# Altium PCB SignalAnalyse.PcbDoc (part 2 of 2)
Units mil, origin at the board's own origin, x right, y up, seen from the top; angles counter-clockwise.
Board outline 5265 x 1800 mil, 2 copper layers (Top Layer, Bottom Layer); 89 components, 53 nets, 353 pads, 52 vias.
Unrouted connection lines stored in the file: 1.
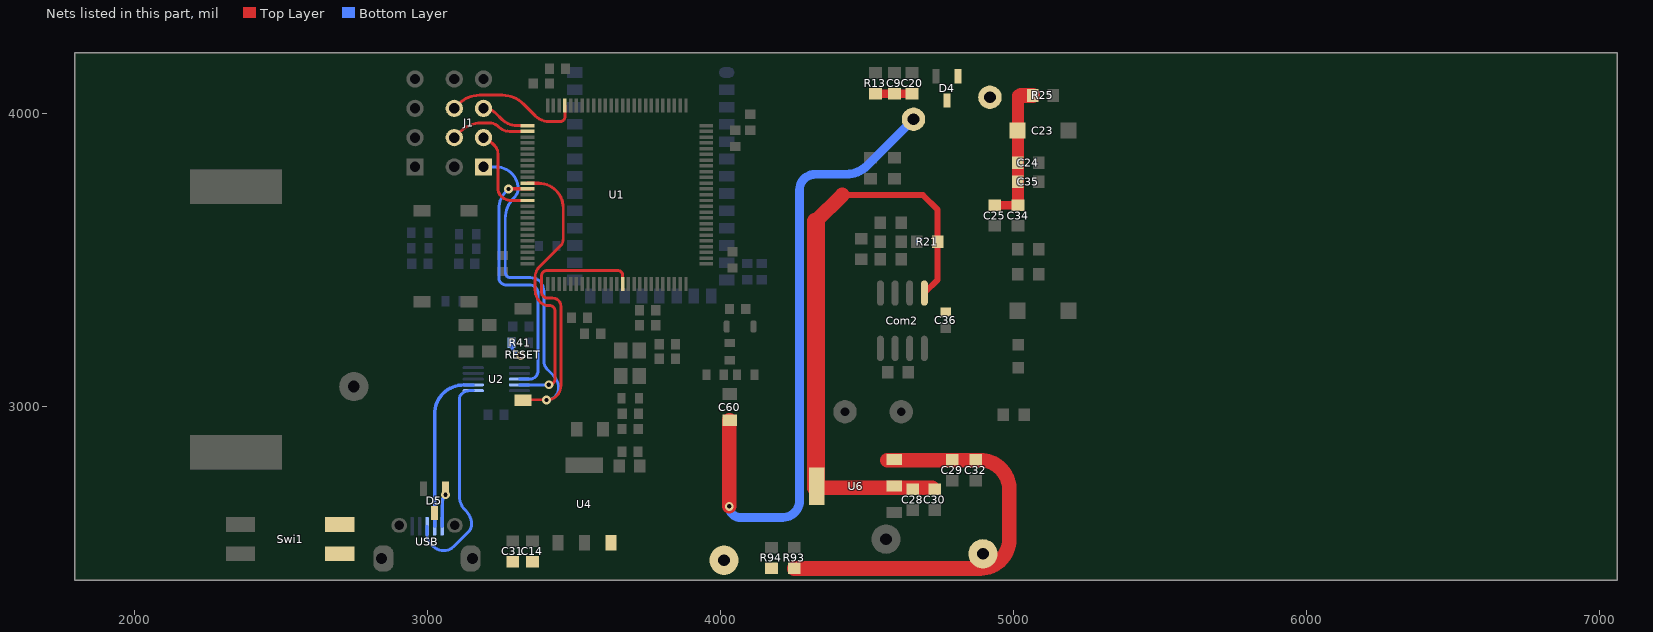
[diagram p2: the nets of this part, all layers, seen from the top]

## Via types
v1: diameter 30, hole 15, Top Layer to Bottom Layer, 41 vias
v2: diameter 40, hole 20, Top Layer to Bottom Layer, 4 vias
v3: diameter 100, hole 30, Top Layer to Bottom Layer, 2 vias
v4: diameter 60, hole 20, Top Layer to Bottom Layer, 2 vias
v5: diameter 50, hole 15, Top Layer to Bottom Layer, 2 vias
v6: diameter 100, hole 20, Top Layer to Bottom Layer, 1 vias

## Nets (pads, with @x,y where several pads share a name; then routed paths per layer and width w, separated by ;. In a path a pad name is that pad's centre, name@x,y a point inside that pad or via, vN(x,y) a via of type N, cw(c..) or ccw(c..) an arc to the next point about the centre after c; other vN are vias at no path point) (continued)
R\S\T\: J1.1 R41.2 RESET.1 U1.14 | length 2026.6
  Top Layer w10: v1@3315,3171 cw(c3318,3171) v1(3318,3174) ; RESET.1@3326,3022 cw(c3327,3022) 3327,3023 v1@3415.85,3023 ; v1(3406,3022) ccw(c3406,3071) v1@3415.85,3023 ; U1.14@3665.68,3417.88 3665.68,3448.32 ccw(c3650,3448.32) 3650,3464 3406.87,3464 ccw(c3406.87,3446) 3388.87,3446 3388.87,3391.13 ccw(c3410,3391.13) 3410,3370 3427,3370 cw(c3427,3342) 3455,3342 3455,3071 cw(c3406,3071) v1@3415.85,3023
  Bottom Layer w10: J1.1@3191,3818 3234,3818 cw(c3234,3743) 3309,3743 cw(c3270.37,3743) 3297.69,3715.69 3294.29,3712.29 ccw(c3365,3641.58) 3265,3641.58 3265,3458 ccw(c3283,3458) 3283,3440 3351,3440 cw(c3351,3394) 3397,3394 3397,3154.74 ccw(c3437.41,3154.74) 3408.84,3126.16 3429.32,3105.68 cw(c3386.64,3063) 3447,3063 cw(c3406,3063) v1(3406,3022) ; R41.2@3286.94,3218 3286.94,3210.06 ccw(c3323,3210.06) 3323,3174 v1(3318,3174)
RFID: C9.2 C20.2 C60.1 D4.3 pad.2@4659,3981 R13.2 | length 2263
  Top Layer w30: R13.2@4534,4068.13 C9.2@4594,4068.13 C20.2@4654,4068.13
  Top Layer w50: v1(4030,2659) 4030,2952 C60.1@4031,2953
  Bottom Layer w30: v1(4030,2659) ccw(c4068,2659) 4068,2621 4212,2621 ccw(c4212,2679) 4270,2679 4270,3740 cw(c4323,3740) 4323,3793 4429.58,3793 ccw(c4429.58,3893) 4500.29,3822.29 pad.2@4659,3981
TCK: J1.5 U1.76 | length 168.4
  Top Layer w10: J1.5@3191,4018 cw(c3191,3957.64) 3233.68,4000.32 3253,3981 ccw(c3305.58,4033.58) 3305.58,3959.22 U1.76@3340.88,3959.22
TDI: J1.4 U1.77 | length 273.9
  Top Layer w10: J1.4@3091,3918 3111.71,3938.71 cw(c3182.42,3868) 3182.42,3968 3210.2,3968 cw(c3210.2,3920.2) 3244,3954 ccw(c3278.92,3988.92) 3278.92,3939.54 U1.77@3340.88,3939.54
TDO: J1.3 U1.89 | length 320.2
  Top Layer w10: J1.3@3191,3918 cw(c3191,3893.86) 3208.07,3910.93 3229,3890 cw(c3202.44,3863.44) 3240,3863.44 3240,3744.56 ccw(c3277.56,3744.56) 3251,3718 ccw(c3286.45,3753.45) 3286.45,3703.32 U1.89@3340.88,3703.32
TMS: J1.6 U1.72 | length 470.6
  Top Layer w10: J1.6@3091,4018 3106.71,4033.71 cw(c3177.42,3963) 3177.42,4063 3255.58,4063 cw(c3255.58,3963) 3326.29,4033.71 3367.2,3992.8 ccw(c3415,4040.6) 3415,3973 3452.5,3973 ccw(c3452.5,3989.5) 3469,3989.5 3468.83,3989.5 U1.72@3468.83,4028.12
UART1_RX: U1.87 U2.8 | length 898.7
  Top Layer w10: U1.87@3340.88,3742.69 U1.87@3352.89,3742.69
  Top Layer w12: v1(3276,3742.69) U1.87@3340.88,3742.69
  Bottom Layer w10: v1(3276,3742.69) 3268.23,3734.92 ccw(c3329.15,3674) 3243,3674 3243,3440 ccw(c3268,3440) 3268,3415 3349,3415 cw(c3349,3387) 3377,3387 3377,3122 cw(c3348.32,3122) 3351.02,3093.44 ; U2.8@3313.48,3093.32 3351.02,3093.32
UART1_TX: U1.86 U2.9 | length 962.7
  Top Layer w10: 3379.5,3762 cw(c3379.5,3678.5) 3463,3678.5 3463,3572.14 cw(c3428.86,3572.14) 3453,3548 3381.14,3476.14 ; 3381.12,3476.12 ccw(c3415.28,3442) 3367,3442 3367,3398.04 ccw(c3425.04,3398.04) 3384,3357 ccw(c3412.97,3385.97) 3412.97,3345 3416,3345 cw(c3416,3326) 3435,3326 3435,3095 cw(c3414,3095) v1(3414,3074) v1@3410,3074
  Top Layer w12: U1.86@3340.88,3762 3379.5,3762
  Bottom Layer w10: U2.9@3313.48,3073.63 v1@3408,3073.16 ; v1(3414,3074) ccw(c3414,3076) v1@3416,3076
UD+: U2.1 USB.3 | length 754
  Bottom Layer w10: USB.3@2998,2591 2998,2566 ccw(c3056,2566) 3056,2508 ccw(c3056,2553.87) 3088.44,2521.44 3140.1,2573.1 ccw(c3116.2,2597) 3150,2597 ccw(c3082.4,2597) 3130.2,2644.8 3127,2648 cw(c3170.46,2691.46) 3109,2691.46 3109,3027.51 cw(c3129.49,3027.51) 3115,3042 cw(c3143.84,3013.16) 3143.84,3053.94 U2.1@3156,3053.94
UD-: U2.2 USB.2 | length 572.1
  Bottom Layer w10: U2.2@3123.59,3073.63 U2.2@3156,3073.63
  Bottom Layer w12: USB.2@3023.59,2591 3023.59,2973.63 cw(c3123.59,2973.63) 3068.99,3057.41 cw(c3123.59,2973.63) U2.2@3123.59,3073.63
VCC_5_RF: C28.2 C30.2 C36.1 Com2.1 R21.2 U6.2 U6.4 | length 2102.6
  Top Layer w20: U6.4@4336.83,2722 U6.4@4351,2736.17 ; 4416,3722 4691,3722 4741.43,3671.57 R21.2@4741.43,3562.98 4741.43,3432.91 Com2.1@4696,3387.47
  Top Layer w50: U6.4@4326,2722 4336.83,2722 C30.2@4722,2722 ; 4326,3632 4416,3722
  Top Layer w60: U6.4@4326,2722 4326,3632
Vcc_un: C14.2 C31.2 D5.3 pad.0@4012,2475 R94.1 Swi1.3 Swi1.4 U4.3
Vcc_un_RF: C29.2 C32.2 pad.2@4896,2497 R93.2 U6.3 | length 1434.5
  Top Layer w50: R93.2@4252,2447 4886,2447 ccw(c4886,2547) 4986,2547 4986,2717 ccw(c4886,2717) 4923.16,2809.84 ccw(c4886,2717) 4886,2817 U6.3@4569.62,2817
Vin+: C23.2 C24.2 C25.1 C34.1 C35.2 D4.1 pad.2@4920,4056 R25.2 | length 495.2
  Top Layer w30: C25.1@4936,3687.43 5015.57,3687.43 C34.1@5016,3687.43 ; 5015.57,3862 5016,3861.57
  Top Layer w40: C34.1@5015.57,3687.43 C35.2@5015.57,3767 C24.2@5015.57,3832 5015.57,3862 5015.57,4062
  Top Layer w50: 5025.57,4062 R25.2@5065.57,4062
VUSB: D5.1 USB.1 | length 120.6
  Top Layer w12: D5.1@3055,2706 3061,2700 v1(3061,2699)
  Bottom Layer w12: USB.1@3049.18,2591 3049.18,2670.47 cw(c3089.53,2670.47) v1(3061,2699)
pads on no net: D4.2 D5.2 U1.1 U1.2 U1.3 U1.4 U1.5 U1.7 U1.8 U1.9 U1.13 U1.15 U1.16 U1.17 U1.18 U1.22 U1.23 U1.24 U1.28 U1.30 U1.31 U1.32 U1.33 U1.34 U1.35 U1.36 U1.37 U1.38 U1.39 U1.40 U1.41 U1.42 U1.43 U1.44 U1.45 U1.46 U1.47 U1.51 U1.52 U1.55 U1.56 U1.57 U1.58 U1.59 U1.60 U1.61 U1.62 U1.66 U1.67 U1.68 U1.69 U1.70 U1.71 U1.78 U1.79 U1.80 U1.81 U1.82 U1.83 U1.84 U1.85 U1.88 U1.95 U1.96 U1.97 U1.98 U2.4 U2.5 U3.3 U3.4 U3.5 U3.6 U3.7 U3.8 U3.9 U3.10 U3.14 U3.15 U3.16 U3.17 U3.18 U3.19 U3.20 U3.23 U3.25 U3.27 U3.28 U3.29 U3.30 U3.31 U3.32 U3.33 U3.34 USB.4

## Polygon pours and split planes (outlines as drawn)
VCC_5_RF on Top Layer "VCC_5_RF_L01_P082" (solid, remove dead copper, pour order 82): 4789,3306 4741,3306 cw(c4741,3339.8) 4717.1,3315.9 4690.61,3342.39 cw(c4716.21,3368) 4680,3368 4680,3405.44 cw(c4717.56,3405.44) 4691,3432 4692.71,3433.71 ccw(c4622,3504.42) 4722,3504.42 4722,3685 4752,3685 cw(c4752,3676) 4761,3676 4761,3358 ccw(c4776,3358) 4776,3343 4789,3343
GND_RF2 on Top Layer "GND_RF2_L01_P080" (solid, remove dead copper, pour order 80): 4787,3251 4787,3282 ccw(c4783,3282) 4783,3286 4704,3286 cw(c4704,3298) 4692,3298 ccw(c4678,3298) 4678,3312 4650.9,3312 ccw(c4650.9,3288.1) 4634,3305 cw(c4566.4,3372.6) 4566.4,3277 4526,3277 ccw(c4526,3216) 4465,3216 4465,3205 ccw(c4515,3205) 4515,3155 4600,3155 ccw(c4600,3163) 4608,3163 4608,3238 cw(c4632,3238) 4632,3262 4734,3262 cw(c4734,3250) 4746,3250 ccw(c4751,3250) 4751,3245 4781,3245 ccw(c4781,3251)
Vcc_un_RF on Top Layer "VCC_UN_RF_L01_P076" (solid, remove dead copper, pour order 76): 4746,2470 4790,2470 ccw(c4790,2498) 4818,2498 4818,2531 cw(c4844,2531) 4844,2557 4936,2557 ccw(c4936,2582) 4961,2582 5001,2582 ccw(c5001,2577) 4996,2577 4996,2532 cw(c4906,2532) 4906,2442 4746,2442
no net on Top Layer "NONET_L01_P074" (solid, remove dead copper, pour order 74): 4765,2467
3.3V on Top Layer "3.3V_L01_P072" (solid, remove dead copper, pour order 72): 4119,3982 3992,3982 ccw(c3992,3965) 3975,3965 3975,3954 cw(c3974,3954) 3974,3953 3908,3953 ccw(c3908,3947) 3902,3947 cw(c3894,3947) 3894,3939 3886,3939 cw(c3886,3954) 3871,3954 3871,3968 cw(c3883,3968) 3883,3980 3919,3980 ccw(c3919,3994) 3933,3994 cw(c3953,3994) 3953,4014 4119,4014
RFID on Top Layer "RFID_L01_P066" (solid, remove dead copper, pour order 66): 4758.41,4085 4758.41,4078.41 cw(c4755,4078.41) 4755,4075 4680,4075 cw(c4680,4079) 4676,4079 4676,4088 ccw(c4673,4088) 4673,4091 4505,4091 ccw(c4505,4081) 4495,4081 4495,3988 ccw(c4536.04,3988) 4507.02,3958.98 4523,3943 ccw(c4564.04,3984.04) 4564.04,3926 4765,3926 ccw(c4765,3947) 4786,3947 4786,4085
Vcc_un on Top Layer "VCC_UN_L01_P064" (solid, remove dead copper, pour order 64): 4040.63,2518.37 ccw(c4012.55,2490.28) 4012.55,2530 3754.04,2530 cw(c3754.04,2588.04) 3713,2547 3702.33,2557.67 ccw(c3646,2501.33) 3646,2581 3590,2581 ccw(c3590,2566) 3575,2566 3575,2500 cw(c3565,2500) 3565,2490 3255,2490 cw(c3255,2506) 3239,2506 3239,2513 3239,2522 3239,2602 3239,2647 ccw(c3219,2647) 3219,2667 2594,2667 ccw(c2594,2653) 2580,2653 2580,2455 ccw(c2620,2455) 2620,2415 2773,2415 ccw(c2773,2446.68) 2804.68,2446.68 2804.68,2498.8 cw(c2842.2,2498.8) 2842.2,2536.32 2855.8,2536.32 cw(c2855.8,2498.8) 2893.32,2498.8 2893.32,2429.68 ccw(c2908.5,2430.18) 2909,2415 3082,2415 ccw(c3082,2436.96) 3103.96,2436.96 3103.96,2500.08 cw(c3140.2,2500.08) 3140.2,2536.32 3153.8,2536.32 cw(c3153.8,2498.8) 3191.32,2498.8 3191.32,2432.68 ccw(c3209,2432.68) 3209,2415 4181,2415 ccw(c4181,2430) 4196,2430 4196,2466 ccw(c4189,2466) 4189,2473 4103,2473 cw(c4103,2514.04) 4073.98,2485.02
GND_RF2 on Top Layer "GND_RF2_L01_P060" (solid, remove dead copper, pour order 60): 4758,3849 ccw(c4733,3849) 4733,3874 4581,3874 ccw(c4581,3862) 4569,3862 4569,3832 ccw(c4575,3832) 4575,3826 4636,3826 cw(c4636,3809) 4653,3809 4653,3793 ccw(c4703,3793) 4703,3743 4716,3743 ccw(c4716,3785) 4758,3785
Vin+ on Top Layer "VIN+_L01_P058" (solid, remove dead copper, pour order 58): 5089,4192 5089,4028 cw(c5074,4028) 5074,4013 4820,4013 cw(c4820,4034) 4799,4034 4799,4183 cw(c4814,4183) 4814,4198 5083,4198 cw(c5083,4192)
GND on Top Layer "GND_L01_P050" (solid, remove dead copper, pour order 50): 4048,3409 3935,3409 cw(c3935,3417) 3927,3417 3927,3493 4063,3493 ccw(c4063,3513) 4083,3513 4083,3907 ccw(c4063,3907) 4063,3927 4028.83,3927 cw(c4028.83,3933.83) 4024,3929 ccw(c4011.93,3916.93) 4011.93,3934 3974,3934 3974,3945 4029,3945 ccw(c4029,3949) 4033,3949 4033,3958 cw(c4035,3958) 4035,3960 4149,3960 ccw(c4149,4002) 4191,4002 4235,4002 4235,2780 cw(c4216,2780) 4216,2761 4117,2761 cw(c4117,2762) 4116,2762 4115,2762 cw(c4115,2777) 4100,2777 4100,3185 ccw(c4084,3185) 4084,3201 cw(c4084,3217) 4068,3217 4068,3389 ccw(c4048,3389)
3.3V on Top Layer "3.3V_L01_P046" (solid, remove dead copper, pour order 46): 3817,2770 ccw(c3828,2770) 3828,2759 3968,2759 ccw(c3968,2767) 3976,2767 3976,3218 ccw(c3962,3218) 3962,3232 3831,3232 ccw(c3831,3218) 3817,3218
GND on Top Layer "GND_L01_P044" (solid, remove dead copper, pour order 44): 3296,3313 3296,3365 cw(c3313,3365) 3313,3382 3338,3382 cw(c3338,3364) 3356,3364 3356,3313
GND on Top Layer "GND_L01_P040" (solid, remove dead copper, pour order 40): 3522.28,3219.9 cw(c3496.4,3194.02) 3533,3194.02 3533,3010 ccw(c3538,3010) 3538,3005 3557,3005 ccw(c3557,3014) 3566,3014 3566,3275 cw(c3576,3275) 3576,3285 3583,3285 ccw(c3583,3295) 3593,3295 3593,3441 ccw(c3591,3441) 3591,3443 3583,3443 ccw(c3583,3441) 3581,3441 3581,3329 cw(c3573,3329) 3573,3321 3526,3321 ccw(c3526,3315) 3520,3315 3520,3229 ccw(c3539.31,3229)
3.3V on Top Layer "3.3V_L01_P026" (solid, remove dead copper, pour order 26): 3663,2771 3399,2771 cw(c3399,2801) 3369,2801 3369,2876 ccw(c3343,2876) 3343,2902 3319,2902 cw(c3319,2920) 3301,2920 3301,2929 cw(c3319,2929) 3319,2947 3456,2947 ccw(c3456,2961) 3470,2961 3470,3322 cw(c3475,3322) 3475,3327 3497,3327 cw(c3497,3317) 3507,3317 3507,3213 cw(c3507,3195) 3525,3195 3525,3194 cw(c3507,3194) 3507,3176 3507,3005 ccw(c3518,3005) 3518,2994 3566,2994 ccw(c3566,3003) 3575,3003 3575,3267 cw(c3580,3267) 3580,3272 3598,3272 ccw(c3598,3274) 3600,3274 3600,3440 cw(c3602,3440) 3602,3442 3611,3442 cw(c3611,3440) 3613,3440 3613,2983 cw(c3602,2983) 3602,2972 3550,2972 ccw(c3550,2962) 3540,2962 3540,2883 ccw(c3550,2883) 3550,2873 3622,2873 3672,2873 cw(c3672,2866) 3679,2866 3679,2787 cw(c3663,2787)
3.3V on Top Layer "3.3V_L01_P034" (solid, remove dead copper, pour order 34): 3319.26,2902.02 3319.26,2902 3266,2902 cw(c3266,2914) 3254,2914 3254,3377 ccw(c3217,3377) 3217,3414 3115,3414 cw(c3115,3433) 3096,3433 3096,3470 ccw(c3079,3470) 3079,3487 2950,3487 cw(c2950,3505) 2932,3505 2932,3622 cw(c2943,3622) 2943,3633 3154,3633 cw(c3154,3623) 3164,3623 3164,3500 ccw(c3172,3500) 3172,3492 3354,3492 3354,3481 3342.83,3481 ccw(c3342.83,3474.17) 3338,3479 ccw(c3342.83,3474.17) 3336,3474.17 3336,3430 cw(c3321,3430) 3321,3415 3293,3415 ccw(c3293,3400) 3278,3400 3278,2988 ccw(c3319,2988) 3319,2947
GND on Top Layer "GND_L01_P036" (solid, remove dead copper, pour order 36): 3178,3518 ccw(c3196,3518) 3196,3500 3358.86,3500 ccw(c3358.86,3534.14) 3383,3510 3428.81,3555.81 ccw(c3406.62,3578) 3438,3578 3438,3598 ccw(c3427,3598) 3427,3609 3254,3609 ccw(c3254,3572.79) 3228.39,3598.39 3185.78,3555.78 ccw(c3204.56,3537) 3178,3537
NetC51_2 on Top Layer "NETC51_2_L01_P010" (solid, remove dead copper, pour order 10): 3443,4003 3453,4003 ccw(c3453,4005) 3455,4005 3455,4132 cw(c3458,4132) 3458,4135 3487,4135 ccw(c3487,4136) 3488,4136 3488,4171 ccw(c3486,4171) 3486,4173 3443,4173
3.3V on Top Layer "3.3V_L01_P014" (solid, remove dead copper, pour order 14): 3403,4003 3414,4003 ccw(c3414,4005) 3416,4005 3416,4067 ccw(c3411,4067) 3411,4072 3389,4072 cw(c3389,4080) 3381,4080 3381,4141 ccw(c3373,4141) 3373,4149 3178,4149 ccw(c3178,4126) 3155,4126 3155,4094 ccw(c3172,4094) 3172,4077 3355,4077 cw(c3355,4071) 3361,4071 3361,4060 ccw(c3369,4060) 3369,4052 3395,4052 cw(c3395,4047) 3400,4047 3400,4006 ccw(c3403,4006)
GND on Top Layer "GND_L01_P024" (solid, remove dead copper, pour order 24): 3702,2774 ccw(c3717,2774) 3717,2759 3801,2759 ccw(c3801,2765) 3807,2765 3807,3230 ccw(c3804,3230) 3804,3233 3745,3233 cw(c3745,3238) 3740,3238 3740,3345 ccw(c3735,3345) 3735,3350 3703,3350 ccw(c3703,3346) 3699,3346 3699,3166 ccw(c3704,3166) 3704,3161 3769,3161 cw(c3769,3156) 3774,3156 3774,3000 cw(c3768,3000) 3768,2994 3705,2994 ccw(c3705,2991) 3702,2991
NetC55_1 on Top Layer "NETC55_1_L01_P022" (solid, remove dead copper, pour order 22): 3574,2899 ccw(c3581,2899) 3581,2892 3674,2892 ccw(c3674,2902) 3684,2902 3684,3131 ccw(c3681,3131) 3681,3134 3637,3134 ccw(c3637,3132) 3635,3132 3635,2956 cw(c3627,2956) 3627,2948 3580,2948 ccw(c3580,2942) 3574,2942
3.3V on Top Layer "3.3V_L01_P018" (solid, pour order 18): 3697,3133
3.3V on Top Layer "3.3V_L01_P016" (solid, pour order 16): 3697,3133
GND on Top Layer "GND_L01_P012" (solid, remove dead copper, pour order 12): 3505,2668 3557,2668 cw(c3557,2649) 3576,2649 3576,2624 ccw(c3598,2624) 3598,2602 3656.72,2602 cw(c3656.72,2533.72) 3705,2582 ccw(c3748.46,2625.46) 3748.46,2564 4231,2564 ccw(c4231,2601) 4268,2601 4268,3724 cw(c4368,3724) 4368,3824 4530,3824 ccw(c4530,3843) 4549,3843 4549,3868.98 ccw(c4532.98,3868.98) 4532.98,3885 4532,3885 cw(c4532,3958) 4459,3958 4459,4099 cw(c4477,4099) 4477,4117 4675,4117 ccw(c4675,4122) 4680,4122 4680,4174.78 ccw(c4668.78,4174.78) 4668.78,4186 4215,4186 ccw(c4215,4162) 4191,4162 4191,2650 cw(c4153,2650) 4153,2612 3843,2612 cw(c3843,2649) 3806,2649 3806.24,2770.76 cw(c3806.8,2770.2) 3806.8,2771 3703.02,2771 cw(c3703.02,2772.02) 3702,2772.02 3702,2758 cw(c3688,2758) 3688,2744 3398,2744 cw(c3398,2799) 3343,2799 3343,2808 ccw(c3316,2808) 3316,2835 3231,2835 cw(c3231,2886) 3180,2886 3180,3113 ccw(c3154,3113) 3154,3139 3106,3139 cw(c3106,3160) 3085,3160 3085,3186.48 ccw(c3060.35,3186.48) 3060.35,3211.13 cw(c3060.35,3235.48) 3036,3235.48 3036,3314 cw(c3060,3314) 3060,3338 3160,3338 cw(c3160,3316) 3182,3316 3182,3263.82 ccw(c3194.82,3263.82) 3194.82,3251 3226,3251 ccw(c3226,3264) 3239,3264 3239,3363.78 ccw(c3223.78,3363.78) 3223.78,3379 3091,3379 cw(c3091,3400) 3070,3400 3070,3431.38 ccw(c3056.38,3431.38) 3056.38,3445 3025.62,3445 ccw(c3025.62,3426.6) 3012.61,3439.61 2961.66,3388.66 cw(c2948,3402.31) 2948,3383 2913,3383 cw(c2913,3439) 2857,3439 2857,4040.59 cw(c2893.56,4040.69) 2893.46,4077.25 ccw(c2896,4090) 2896,4077 3106,4077 ccw(c3106,4097) 3126,4097 3126,4151 cw(c3139,4151) 3139,4164 3398,4164 3398,4088 ccw(c3402,4088) 3402,4084 3418,4084 cw(c3418,4079) 3423,4079 3423,4005 ccw(c3425,4005) 3425,4003 3434,4003 ccw(c3434,4004) 3435,4004 3435,4179 ccw(c3425,4179) 3425,4189 2894,4189 ccw(c2894,4178.04) 2891.85,4188.79 2891.85,4189 2633,4189 ccw(c2633,4157) 2601,4157 2601,2815 ccw(c2633,2815) 2633,2783 3093,2783 cw(c3093,2762) 3114,2762 3114,2726 ccw(c3143,2726) 3143,2697 3227,2697 cw(c3227,2655) 3269,2655 3269,2520 ccw(c3280,2520) 3280,2509 3467,2509 ccw(c3467,2520) 3478,2520 3478,2641 cw(c3505,2641)
ADC on Top Layer "ADC_L01_P004" (solid, remove dead copper, pour order 4): 4008,3201 4046,3201 ccw(c4046,3207) 4052,3207 4052,3375 ccw(c4043,3375) 4043,3384 3899,3384 cw(c3899,3393) 3890,3393 3890,3440 ccw(c3886,3440) 3886,3444 3879,3444 ccw(c3879,3441) 3876,3441 3876,3386 ccw(c3893,3386) 3893,3369 3992,3369 cw(c3992,3359) 4002,3359 4002,3207 ccw(c4008,3207)
no net on Top Layer "Top Layer-No Net" (solid, pour order 0): 3970,3217
3.3V on Bottom Layer "3.3V_L02_P070" (solid, remove dead copper, pour order 70): 3761,3510 3784,3510 ccw(c3784,3526) 3800,3526 3800,3964 cw(c3826,3964) 3826,3990 3933,3990 cw(c3933,3972) 3951,3972 3951,3623 cw(c3924,3623) 3924,3596 3881,3596 ccw(c3881,3572) 3857,3572 3857,3530 ccw(c3877,3530) 3877,3510 cw(c3877,3500) 3887,3500 3887,3489 cw(c3881,3489) 3881,3483 3769,3483 cw(c3769,3491) 3761,3491
GND on Bottom Layer "GND_L02_P030" (solid, remove dead copper, pour order 30): 3889.47,2638.53 cw(c3926.83,2601.17) 3926.83,2654 3999.51,2654 ccw(c3999.51,2659) 4004.51,2659 cw(c4030,2659) 4030,2684.49 cw(c4030,2659) 4055.49,2659 ccw(c4062.49,2659) 4062.49,2652 4068,2652 4214,2652 ccw(c4214,2680) 4242,2680 4242,3801 cw(c4310,3801) 4310,3869 4413,3869 ccw(c4413,3913) 4457,3913 4457,4153 ccw(c4424,4153) 4424,4186 4215,4186 ccw(c4215,4162) 4191,4162 4191,3480 cw(c4161,3480) 4161,3450 3995,3450 3995,2790 cw(c3944,2790) 3944,2739 3858.27,2739 cw(c3858.27,2775.08) 3822.19,2775.08 3822.19,3171.81 ccw(c3795,3171.81) 3795,3199 3551,3199 ccw(c3551,3185) 3537,3185 3537,3121.73 ccw(c3565.31,3121.73) 3545.29,3101.71 3548,3099 cw(c3526.28,3077.28) 3554.66,3089.03 cw(c3510.39,3044.76) 3573,3044.76 3573,2627 cw(c3533,2627) 3533,2587 3248,2587 cw(c3248,2610) 3225,2610 ccw(c3212.5,2610) 3212.5,2622.5 3184,2622.5 3184,2546 cw(c3166,2546) 3166,2528 3142,2528 ccw(c3142,2498) 3112,2498 cw(c3092,2498) 3092,2478 2991,2478 cw(c2991,2516) 2953,2516 2953,2988 cw(c3053,2988) 3053,3088 3197,3088 cw(c3197,3081) 3204,3081 3204,3023 cw(c3194,3023) 3194,3013 3149,3013 ccw(c3149,3002) 3138,3002 3138,2959 ccw(c3154,2959) 3154,2943 3216,2943 ccw(c3216,2951) 3224,2951 3224,3071 ccw(c3197,3071) 3197,3098 3128,3098 cw(c3128,3114) 3112,3114 ccw(c3093.99,3114) 3093.99,3132.01 3089.9,3132.02 ccw(c3085.01,3133) 3090,3133 3090,3218.51 cw(c3110.48,3218.52) 3096,3233 3110.76,3247.76 cw(c3123.41,3235.1) 3123.41,3253 3302,3253 ccw(c3302,3261) 3310,3261 3310,3293 cw(c3321,3293) 3321,3304 3348,3304 ccw(c3348,3317) 3361,3317 3361,3370 ccw(c3335,3370) 3335,3396 3254,3396 cw(c3254,3422) 3228,3422 3228,3527 ccw(c3217,3527) 3217,3538 3212,3538 ccw(c3212,3522) 3196,3522 3196,3469 cw(c3185,3469) 3185,3458 3130,3458 cw(c3130,3465) 3123,3465 3123,3503 ccw(c3118,3503) 3118,3508 2988,3508 ccw(c2988,3504) 2984,3504 2984,3418 ccw(c2992,3418) 2992,3410 3095,3410 cw(c3095,3401) 3104,3401 3104,3304 cw(c3069,3304) 3069,3269 2932,3269 cw(c2932,3289) 2912,3289 2912,4069 cw(c2931,4069) 2931,4088 3106,4088 ccw(c3106,4108) 3126,4108 3126,4165 ccw(c3110,4165) 3110,4181 2648,4181 ccw(c2648,4134) 2601,4134 2601,3198 cw(c2563,3198) 2563,3160 2196,3160 ccw(c2196,3121) 2157,3121 2157,2490 ccw(c2210,2490) 2210,2437 3831,2437 ccw(c3831,2482) 3876,2482 3876,2606 cw(c3922,2606)
GND on Bottom Layer "GND_L02_P068" (solid, remove dead copper, pour order 68): 3138,2980.5 3138,2703.87 ccw(c3202.87,2703.87) 3157,2658 3177.99,2637.01 cw(c3163.48,2622.5) 3184,2622.5 3184.43,2622.5 cw(c3184.43,2564.5) 3225.44,2605.51 cw(c3226.51,2606.58) 3225,2606.58 3225,3065.93 ccw(c3188.17,3065.93) 3214.21,3091.97 ccw(c3234.04,3072.15) 3206,3072.15 3206,2993 3168.18,2993 ccw(c3168.18,2950.32)
GND_RF2 on Bottom Layer "GND_RF2_L02_P054" (solid, remove dead copper, pour order 54): 4316,3747 ccw(c4316,3732) 4301,3732 4301,2442 4756,2442 4756,3844 ccw(c4742,3844) 4742,3858 4663,3858 ccw(c4663,3842) 4647,3842 4647,3762 cw(c4632.5,3761.5) 4633,3747
GND on Bottom Layer "GND_L02_P042" (solid, remove dead copper, pour order 42): 3024,3268 3024,3502 ccw(c3018,3502) 3018,3508 2984,3508 ccw(c2984,3504) 2980,3504 2980,3435 cw(c2962,3435) 2962,3417 2909,3417 ccw(c2909,3409) 2901,3409 2901,3268
3.3V on Bottom Layer "3.3V_L02_P038" (solid, remove dead copper, pour order 38): 3280,2617 cw(c3280,2652) 3245,2652 3245,3113.19 cw(c3249.81,3113.19) 3249.81,3118 3347,3118 cw(c3347,3115) 3350,3115 3350,3111.2 cw(c3346.8,3111.2) 3346.8,3108 3269,3108 ccw(c3269,3103) 3264,3103 3264,3065 ccw(c3270,3065) 3270,3059 3345,3059 cw(c3345,3054) 3350,3054 3350,2913.41 cw(c3339.59,2913.41) 3339.59,2903 3318,2903 ccw(c3318,2890) 3305,2890 3305,2863 ccw(c3323,2863) 3323,2845 3367.37,2845 ccw(c3367.37,2872.63) 3395,2872.63 3395,2918 cw(c3412.43,2918) 3400.11,2930.33 3465.38,2995.6 cw(c3506.38,2978.62) 3475,3010 ccw(c3436.38,3048.63) 3491,3048.63 3491,3078 ccw(c3406.51,3078) 3466.25,3137.75 3452,3152 cw(c3473.72,3173.73) 3443,3173.73 3443,3413.54 ccw(c3381.55,3413.55) 3425,3457 cw(c3468.29,3500.3) 3420.95,3461.47 cw(c3464.81,3505.33) 3402.78,3505.34 3402.78,3578.22 ccw(c3396,3578.22) 3396,3585 3394,3585 3378,3585 cw(c3378,3608) 3355,3608 3355,3682 cw(c3432.25,3682) 3377.63,3736.63 3413.57,3772.56 ccw(c3381.13,3805) 3427,3805 3427,3930.82 ccw(c3334.82,3930.82) 3400,3996 3328.8,4067.2 ccw(c3281,4019.41) 3281,4087 3170,4087 cw(c3170,4102) 3155,4102 3155,4166 cw(c3167,4166) 3167,4178 3438,4178 cw(c3438,4158) 3458,4158 3458,3713 cw(c3444,3713) 3444,3699 3434,3699 ccw(c3434,3674.86) 3416.93,3691.93 3407.36,3682.36 ccw(c3422.72,3667) 3401,3667 ccw(c3427.56,3667) 3408.78,3648.22 3410.89,3646.11 cw(c3393.06,3628.28) 3418.28,3628.28 3418.28,3522.28 ccw(c3490.7,3522.28) 3439.49,3471.07 3441.6,3468.96 ccw(c3504.81,3520.82) 3447,3463 3451.93,3458.07 ccw(c3469,3475.14) 3469,3451 3533.99,3451 ccw(c3533.99,3550.01) 3604,3480 3604.71,3480.71 cw(c3675.42,3410) 3675.42,3510 3994,3510 4049,3510 ccw(c4049,3526) 4065,3526 4065,3555 cw(c4079,3555) 4079,3569 4151,3569 cw(c4151,3551) 4169,3551 4169,3481 cw(c4160,3481) 4160,3472 3994,3472 3959.9,3472 ccw(c3959.9,3448.1) 3943,3465 3902.9,3424.9 cw(c3879,3448.8) 3879,3415 3536.84,3415 ccw(c3536.86,3403.56) 3528.76,3411.64 ccw(c3544.48,3398.52) 3524,3398.51 3524,3273 3948,3273 cw(c3948,3248) 3973,3248 3973,2803 cw(c3935,2803) 3935,2765 3869,2765 cw(c3869,2789) 3845,2789 3845,3178 ccw(c3803,3178) 3803,3220 3524,3220 3524,3089.97 ccw(c3564.97,3089.97) 3536,3061 3536.62,3060.38 cw(c3492.23,3016) 3555,3016 3555,2630 cw(c3542,2630) 3542,2617
3.3V on Bottom Layer "3.3V_L02_P028" (solid, remove dead copper, pour order 28): 3350,2916 cw(c3337,2916) 3337,2903 3255,2903 cw(c3255,2913) 3245,2913 3245,3112 cw(c3251,3112) 3251,3118 3347,3118 cw(c3347,3115) 3350,3115 3350,3112 cw(c3346,3112) 3346,3108 3269,3108 ccw(c3269,3103) 3264,3103 3264,3065 ccw(c3270,3065) 3270,3059 3345,3059 cw(c3345,3054) 3350,3054
3.3V on Bottom Layer "3.3V_L02_P032" (solid, remove dead copper, pour order 32): 3209,2847

## Keep-outs
Keep-Out Layer:
  the board outline again, w10

## Other copper
Top Layer:
  region net R\S\T\: 3362,3002 3362,3194 3296,3194 3296,3002
  region net NetOSC1_1: 3749,3009 3749,3135 3699,3135 3699,3009
  region net NetC60_2: 4073,3020 4073,3173 3995,3173 3995,3020
Bottom Layer:
  region net GND: 3573,3290 3573,3404 3536,3404 3536,3290
  region net NetR43_2: 3529,3530 3529,3568 3426,3568 3426,3530
  region net GND: 4161,3414 4161,3450 3995,3450 3995,3414

## Silkscreen, mask and mechanical layers (free items; w line width, h text height)
Top Overlay:
  text "Vin+" at 4915,4111 h30
  text "-" at 2907,4105 h36 r90
  text "RFID" at 4491,3963 h30
  text "GND" at 4295,3917 h30
  text "1" at 2973,3724 h36 r90
  text "GND_RF" at 5095,3583 h30
  text "Stanford" at 5956,3297 h50
  text "GND" at 2708,2971 h30
  text "3.3V" at 3239,2781 h36
  text "GND" at 3807,2743 h36
  text "+" at 2256,2647 h60
  text "Vext2" at 4995,2480 h30
  text "Vext" at 3848,2444 h30
  text "GND_RF2" at 4459,2443 h30
Bottom Overlay:
  text "GND" at 3051,4170 h36 r90
  text "3V3" at 3234,4139 h36 r180
  text "TMS" at 3051,4062 h36 r90
  text "TCK" at 3234,4038 h36 r180
  text "TDI" at 3051,3947 h36 r90
  text "TDO" at 3234,3935 h36 r180
  text "JTRST" at 3051,3848 h36 r90
  text "RST" at 3234,3832 h36 r180

## Text inside footprints (layer, text, board x,y; h text height)
U1: Multi-Layer "Copyright (C) 2016 Accelerated Designs. All rights reserved" at 3646,3723 h1 r90